# Altium PCB D_class_amplifier_PCB.PcbDoc
Units mm, origin at the board's own origin, x right, y up, seen from the top; angles counter-clockwise.
Board outline 65.6 x 81.6 mm, 2 copper layers (Top Layer, Bottom Layer); 18 components, 20 nets, 60 pads, 0 vias.
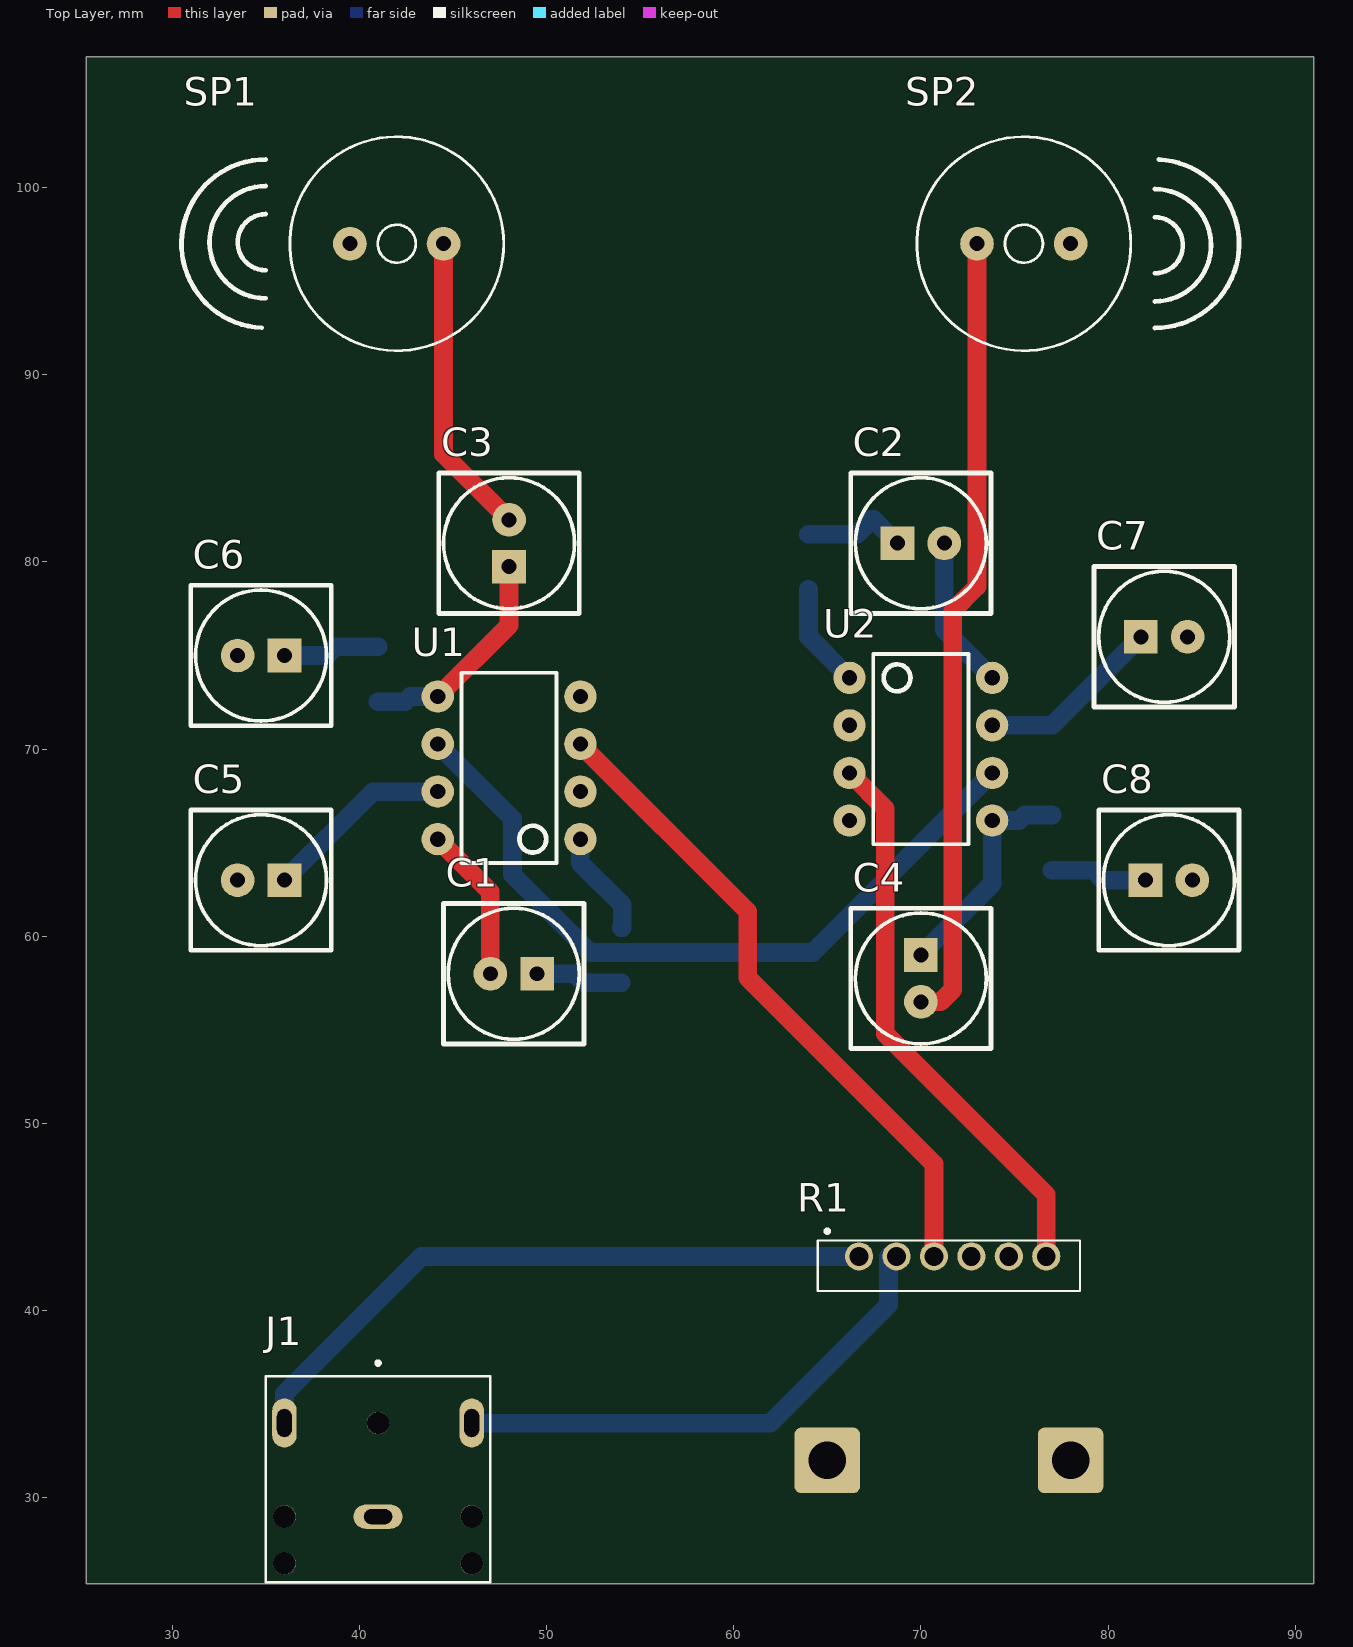
[diagram p0: Top Layer view]
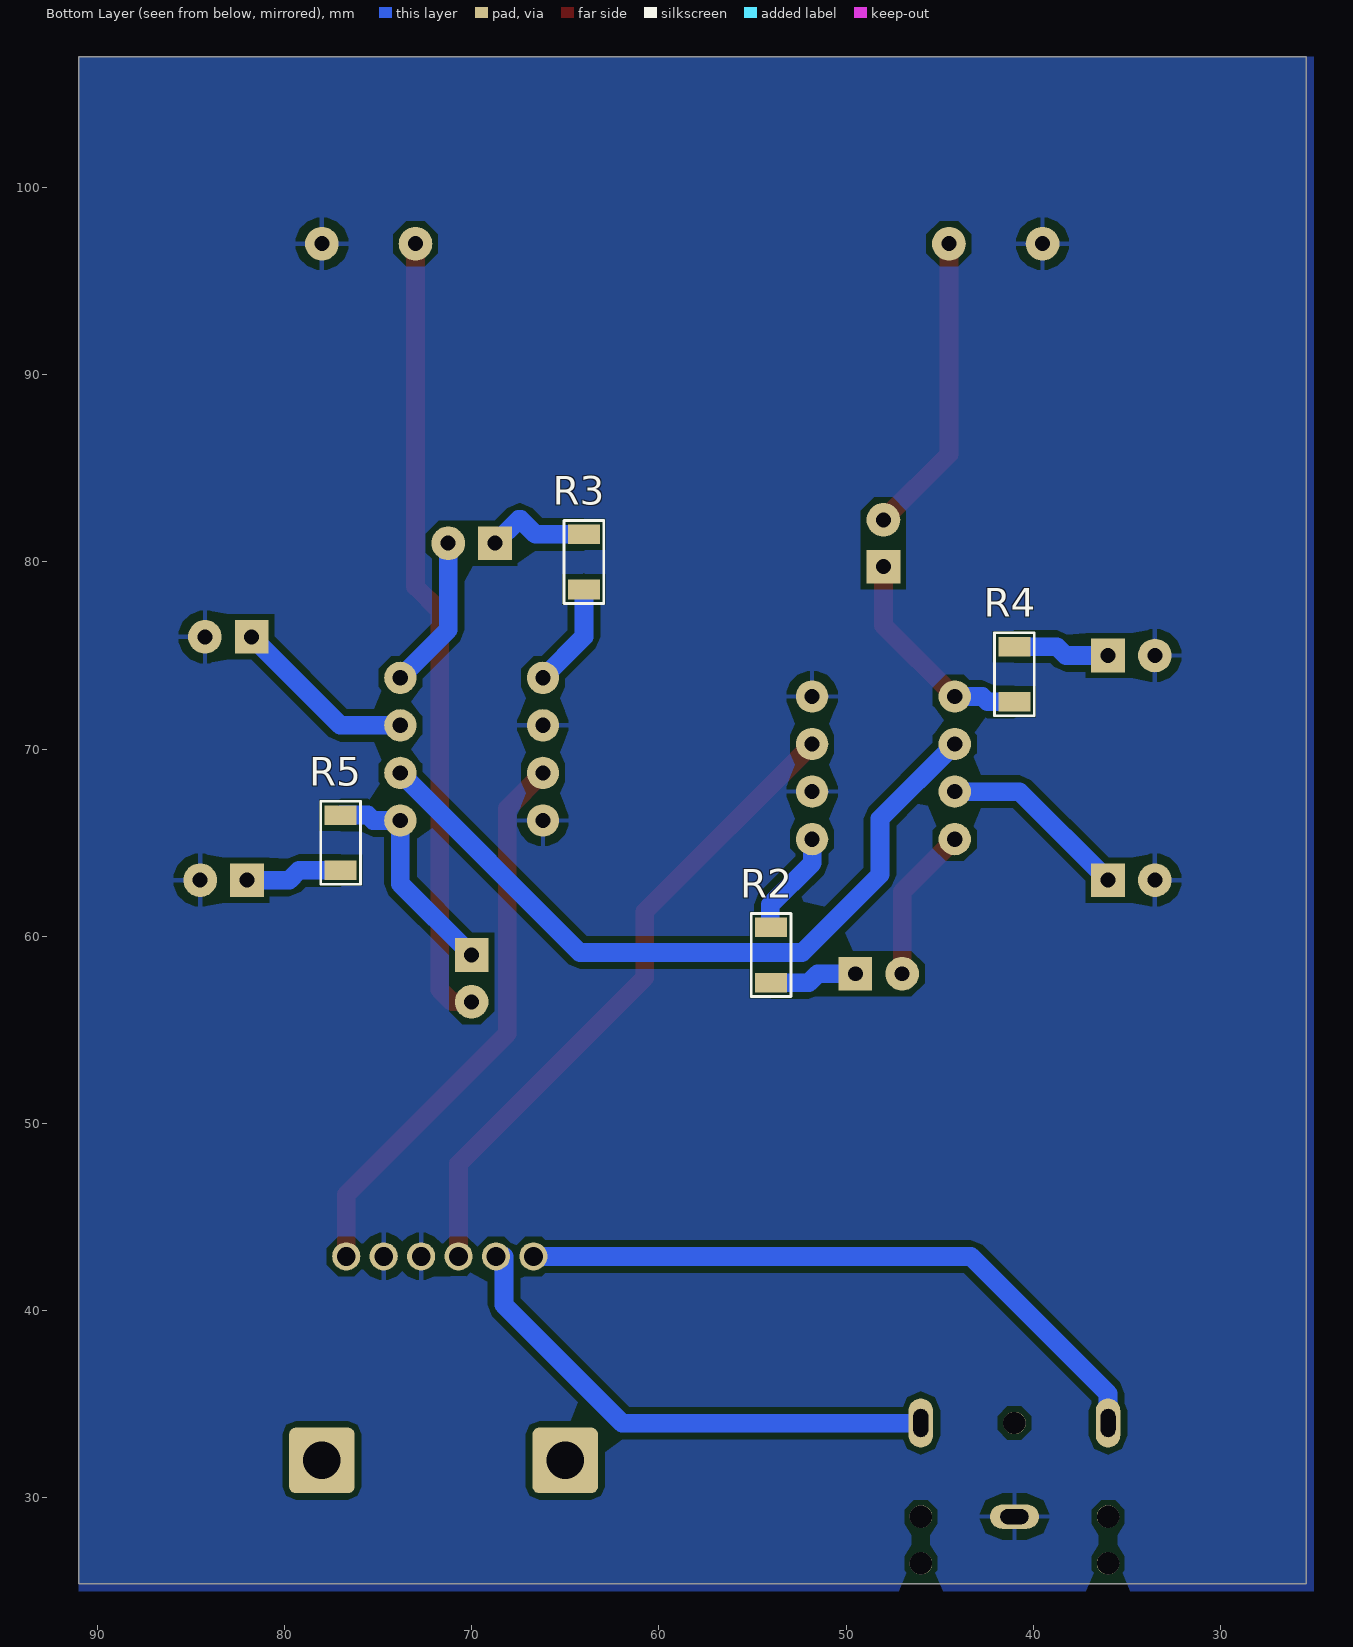
[diagram p1: Bottom Layer view, seen from below]
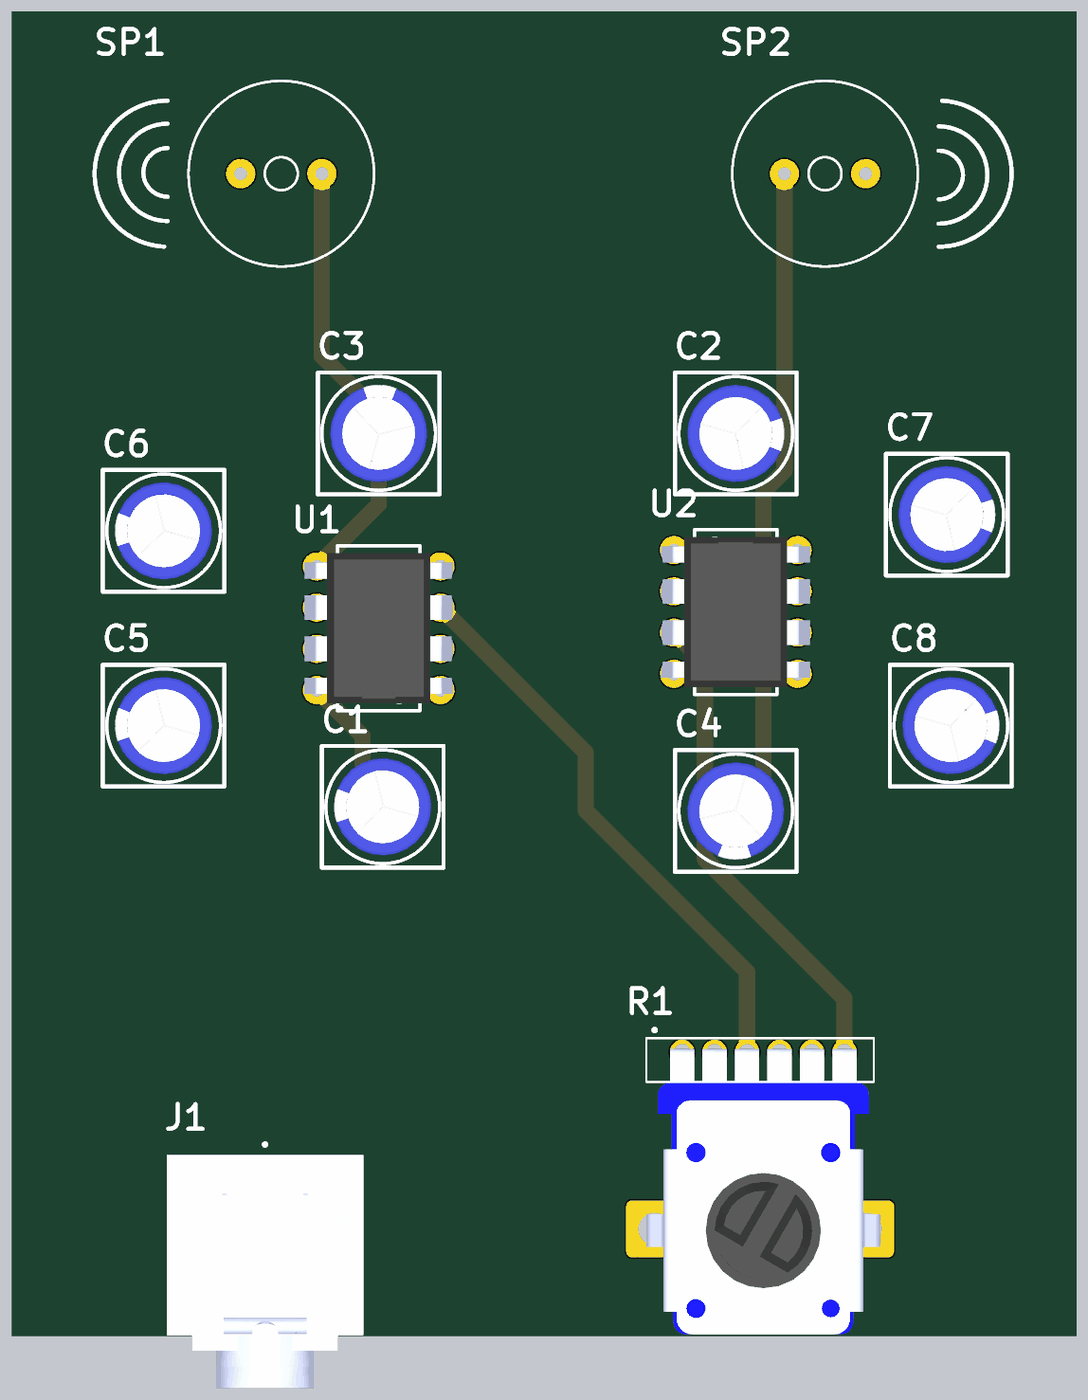
[diagram p2: 3D render of the assembled board from above, using the file's embedded part models]
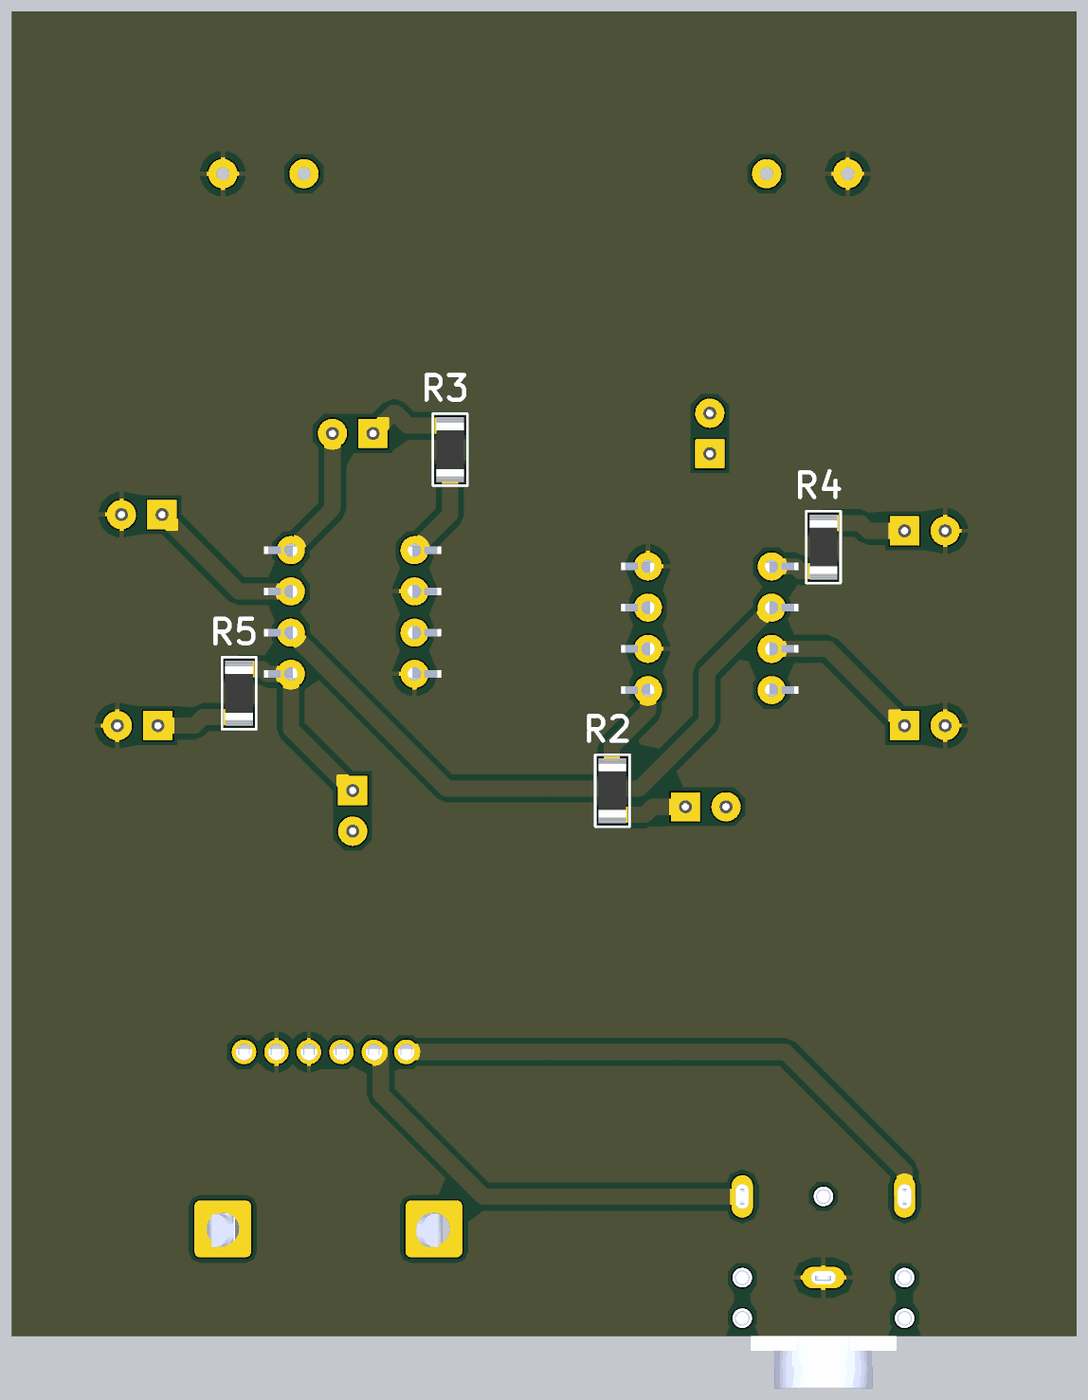
[diagram p3: 3D render of the assembled board from below, using the file's embedded part models]

## Layer stack, top to bottom
Top Solder: solder mask 0.0102, Solder Resist, Dk 3.5
Top Layer: signal copper 0.0356
Dielectric 1: dielectric 0.32, FR-4, Dk 4.8
Bottom Layer: signal copper 0.0356
Bottom Solder: solder mask 0.0102, Solder Resist, Dk 3.5

## Board outline
25.4,25.4 91,25.4 91,107 25.4,107

## Design rules (kind name [scope] priority, off if disabled: settings)
Clearance [All] p1: gap=0.3 ignorepadtopadclearanceinfootprint=FALSE
PolygonConnect PolygonConnect_1 [All vs IsNamedPolygon('GND_L02_P000')] p1: connectstyle=Relief reliefconductorwidth=0.254 reliefentries=4 polygonreliefangle="90 Angle" airgapwidth=0.5
PolygonConnect [All] p2: connectstyle=Relief reliefconductorwidth=0.254 reliefentries=4 polygonreliefangle="90 Angle" airgapwidth=0.254
RoutingVias [All] p1: holewidth=0.711 width=1.27 viastyle="Through Hole" minholewidth=0.711 minwidth=1.27 maxholewidth=0.711 maxwidth=1.27
SolderMaskExpansion [All] p1: expansion=0.102 istentingtop=FALSE
SupplyNets "Schematic Supply Nets_7" [InNet('Vin L')] p1: voltage=0.000
SupplyNets "Schematic Supply Nets_6" [InNet('Right')] p2: voltage=0.000
SupplyNets "Schematic Supply Nets_5" [InNet('Vout R')] p3: voltage=0.000
SupplyNets "Schematic Supply Nets_4" [InNet('Vs')] p4: voltage=0.000
SupplyNets "Schematic Supply Nets_3" [InNet('Left')] p5: voltage=0.000
SupplyNets "Schematic Supply Nets_2" [InNet('Vout L')] p6: voltage=0.000
SupplyNets "Schematic Supply Nets_1" [InNet('Vin R')] p7: voltage=0.000
SupplyNets "Schematic Supply Nets" [InNet('GND')] p8: voltage=0.000
Width [All] p1: maxlimit=2 minlimit=1 preferedwidth=1
30 further rules are at their usual default settings.

## Components (designator, comment, footprint, x,y, rotation, side; value= is the part's Value field where it differs from the comment)
C1 "10uF" capacity 48.25,58 r180 top
C2 "10uF" capacity 70,81 r0 top
C3 "250uF" capacity 48,81 r90 top
C4 "250uF" capacity 70,57.75 r270 top
C5 "250uF" capacity 34.75,63 r180 top
C6 "0.05uF" capacity 34.75,75 r180 top
C7 "250uF" capacity 83,76 r0 top
C8 "0.05uF" capacity 83.25,63 r0 top
J1 "SJ1-3523N" SJ1-3523N 41,30.25 r0 top
R1 "10K" PTV112-4 71.5,37.45 r0 top
R2 "1.2K" "resistor 1206" 54,59 r270 bottom
R3 "1.2K" "resistor 1206" 64,80 r90 bottom
R4 "10" "resistor 1206" 41,74 r270 bottom
R5 "10" "resistor 1206" 77,65 r90 bottom
SP1 "speaker" speaker 42,97 r180 top
SP2 "speaker" speaker 75.5,97 r0 top
U1 "LM386" LM386 48,69 r90 top
U2 "LM386" LM386 70,70 r270 top

## Footprints (in the part's own frame and the unit in brackets; to place one, negate y for a bottom-side part, rotate by r counter-clockwise, add the part's x,y. Pads: shape width x height; smd on the part's side, far side on the other; paste and mask are expansions set on the pad)
capacity [mm]
  rect 1.8x1.8 hole 0.8: 1(-1.25,0)
  round 1.8 hole 0.8: 2(1.25,0)
  silkscreen extent -3.75,-3.75 3.75,3.75, body extent -3,-3 3,3, height 7.3
LM386 [mil]
  round 68 hole 32: 1(-150,-150) 2(-50,-150) 3(50,-150) 4(150,-150) 5(150,150) 6(50,150) 7(-50,150) 8(-150,150)
  silkscreen extent -200,-100 200,100, body extent -182,-215 182,215, height 210
PTV112-4 [mm]
  round 1.508 hole 1: 1(3.198,5.45) 2(5.198,5.45) 3(-4.802,5.45) 4(1.198,5.45) 5(-0.802,5.45) 6(-2.802,5.45)
  rrect20% 3.5x3.5 hole 2: PT1(-6.5,-5.45) PT2(6.5,-5.45)
  silkscreen extent -7,3.6 7,6.9, body extent -7,-11.95 7.4,5.65, height 22
"resistor 1206" [mm]
  rect 1.05x1.7 smd: 1(-1.475,0) 2(1.475,0)
  silkscreen extent -2.22,-1.06 2.22,1.06, body extent -1.65,-0.85 1.65,0.85, height 0.94
SJ1-3523N [mm]
  oval 2.616x1.308 hole 0.8 slot 1.5 at 0 deg: 1(0,-1.25)
  oval 1.308x2.616 hole 0.8 slot 1.5 at 90 deg: 2(5,3.75) 3(-5,3.75)
  round 1.2 hole 1.2 unplated: ""(-5,-3.75) ""(-5,-1.25) ""(0,3.75) ""(5,-3.75) ""(5,-1.25)
  silkscreen extent -6,-4.75 6,7.05, body extent -6,-8.06 6,6.24, height 7.01
speaker [mm]
  round 1.8 hole 0.8: 1(-2.5,0) 2(2.5,0)
  silkscreen extent -5.71,-5.71 11.5,5.71

## Part data
C1 C2 C3 C4 C5 C6 C7 C8: library part "Cap electrolitic radial 6x7-2.5", "Cap electrolitic radial 6x7-2.5"
R1: library part PTV112-4
R2 R3 R4 R5: library part "Resistor 1206"

## Nets (pads, with @x,y where several pads share a name; then routed paths per layer and width w, separated by ;. In a path a pad name is that pad's centre, name@x,y a point inside that pad or via, vN(x,y) a via of type N, cw(c..) or ccw(c..) an arc to the next point about the centre after c; other vN are vias at no path point)
GND: C5.2 C6.2 C7.2 C8.2 J1.1 R1.1 R1.4 SP1.2 SP2.2 U1.2 U1.4 U2.2 U2.4
Left: J1.2 R1.6 | length 27.9
  Bottom Layer w1: J1.2 46,33.985 61.951,33.985 68.275,40.31 68.275,42.9 R1.6
NetC1_1: C1.1 R2.2 | length 4.7
  Bottom Layer w1: C1.1 51.511,58 51.986,57.525 R2.2
NetC1_2: C1.2 U1.8 | length 8.4
  Top Layer w1: U1.8 47,62.38 C1.2
NetC2_1: C2.1 R3.2 | length 5.6
  Bottom Layer w1: R3.2 66.591,81.475 67.378,82.262 67.488,82.262 C2.1
NetC2_2: C2.2 U2.8 | length 8.3
  Bottom Layer w1: C2.2 71.25,76.37 U2.8
NetC3_1: C3.1 R4.2 U1.5 | length 11.8
  Top Layer w1: U1.5 48,76.62 C3.1
  Bottom Layer w1: R4.2 42.443,72.525 42.728,72.81 U1.5
NetC4_1: C4.1 R5.2 U2.5 | length 12.1
  Bottom Layer w1: C4.1 73.81,62.81 U2.5 75.26,66.19 75.545,66.475 R5.2
NetC5_1: C5.1 U1.7 | length 10.1
  Bottom Layer w1: C5.1 40.73,67.73 U1.7
NetC6_1: C6.1 R4.1 | length 5.2
  Bottom Layer w1: C6.1 38.252,75 38.727,75.475 R4.1
NetC7_1: C7.1 U2.7 | length 9.9
  Bottom Layer w1: U2.7 77.02,71.27 C7.1
NetC8_1: C8.1 R5.1 | length 5.2
  Bottom Layer w1: R5.1 79.223,63.525 79.748,63 C8.1
NetR2_1: R2.1 U1.1 | length 5.7
  Bottom Layer w1: U1.1 51.81,63.912 54.043,61.679 54.043,60.475 R2.1
NetR3_1: R3.1 U2.1 | length 5.6
  Bottom Layer w1: R3.1 64,76 U2.1
Right: J1.3 R1.3 | length 35.3
  Bottom Layer w1: J1.3 36,35.56 43.34,42.9 R1.3
"Vin L": R1.2 U2.3 | length 30.2
  Top Layer w1: U2.3 68.097,66.823 68.097,54.788 76.698,46.187 R1.2
"Vin R": R1.5 U1.3 | length 35.2
  Top Layer w1: U1.3 60.757,61.323 60.757,57.785 70.698,47.844 R1.5
"Vout L": C4.2 SP2.1 | length 42.4
  Top Layer w1: C4.2 71.054,56.5 71.704,57.15 71.704,77.394 73,78.69 SP2.1
"Vout R": C3.2 SP1.1 | length 16.2
  Top Layer w1: SP1.1 44.5,85.75 C3.2
Vs: U1.6 U2.6 | length 40
  Bottom Layer w1: U1.6 48.184,66.276 48.184,63.297 52.349,59.131 64.211,59.131 U2.6
pads on no net: J1. R1.PT1 R1.PT2

## Polygon pours and split planes (outlines as drawn)
GND on Bottom Layer "GND_L02_P000" (solid, pour order 0): 25,107 91,107 91,25 25,25

## Text inside footprints (layer, text, board x,y; h text height)
J1: Mechanical 13 "PCB EDGE" at 48,25.75 h0.81
R1: Mechanical 13 "PCB EDGE" at 80.5,26 h1.02